# Altium PCB SW6208 Demo board.PcbDoc (part 1 of 2)
Units mm, origin at the board's own origin, x right, y up, seen from the top; angles counter-clockwise.
Board outline 56.6 x 30 mm, 4 copper layers (Top Layer, Mid-Layer 1, Mid-Layer 2, Bottom Layer); 47 components, 75 nets, 261 pads, 411 vias.
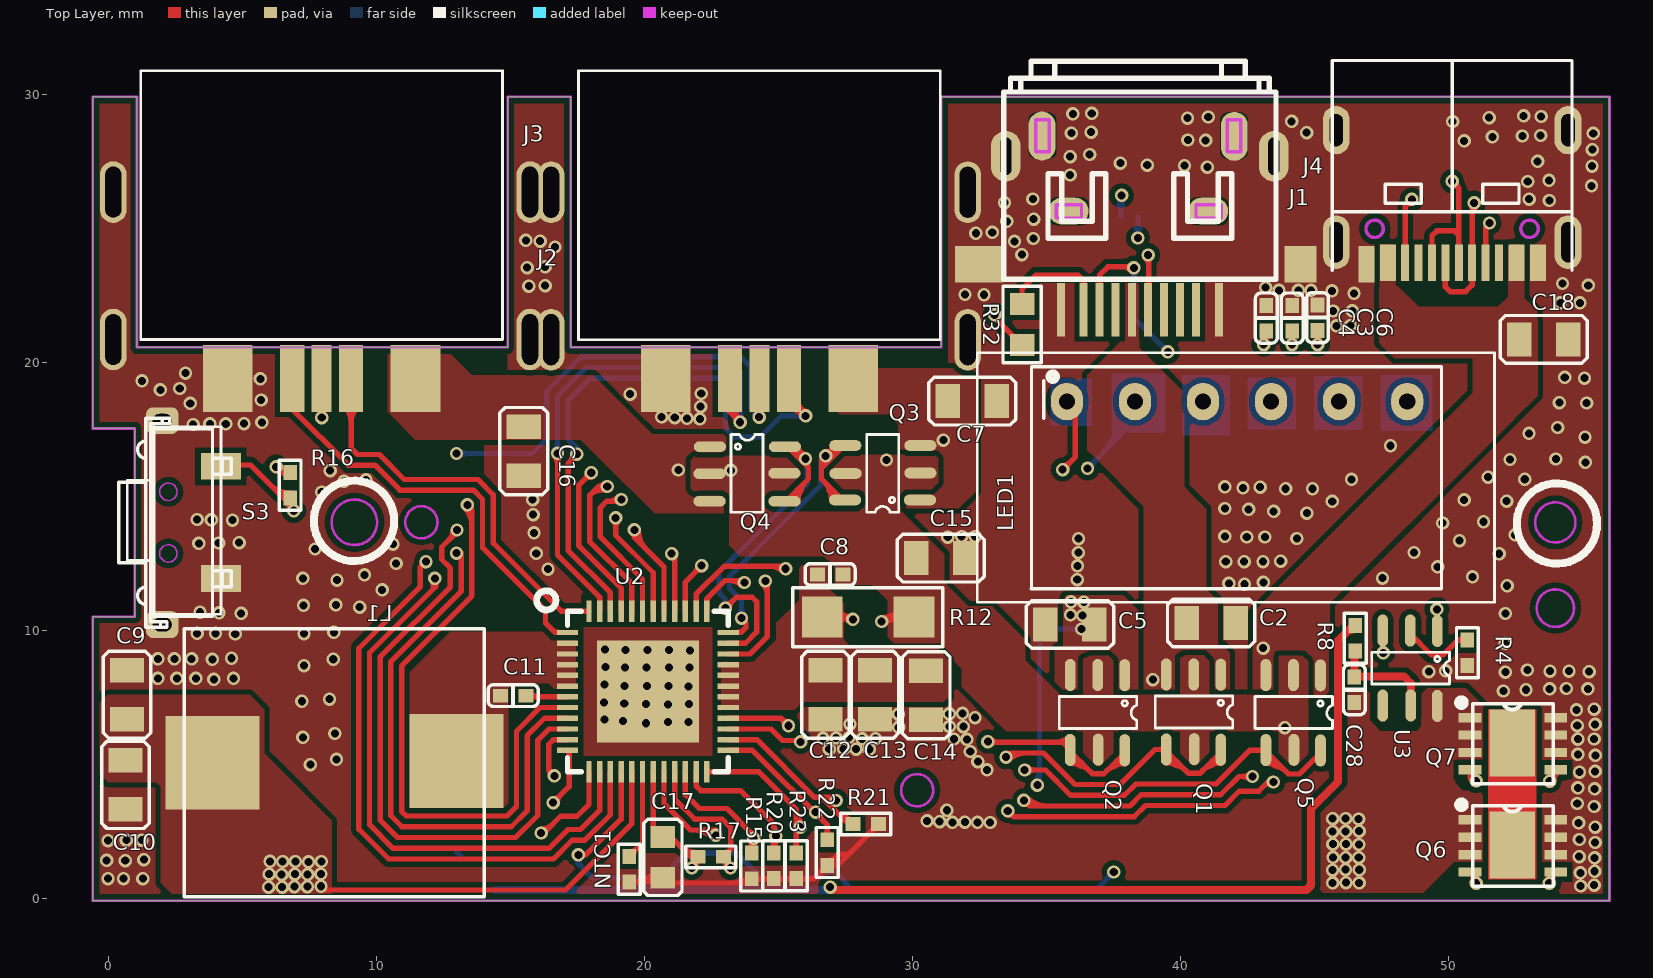
[diagram p0: Top Layer view]
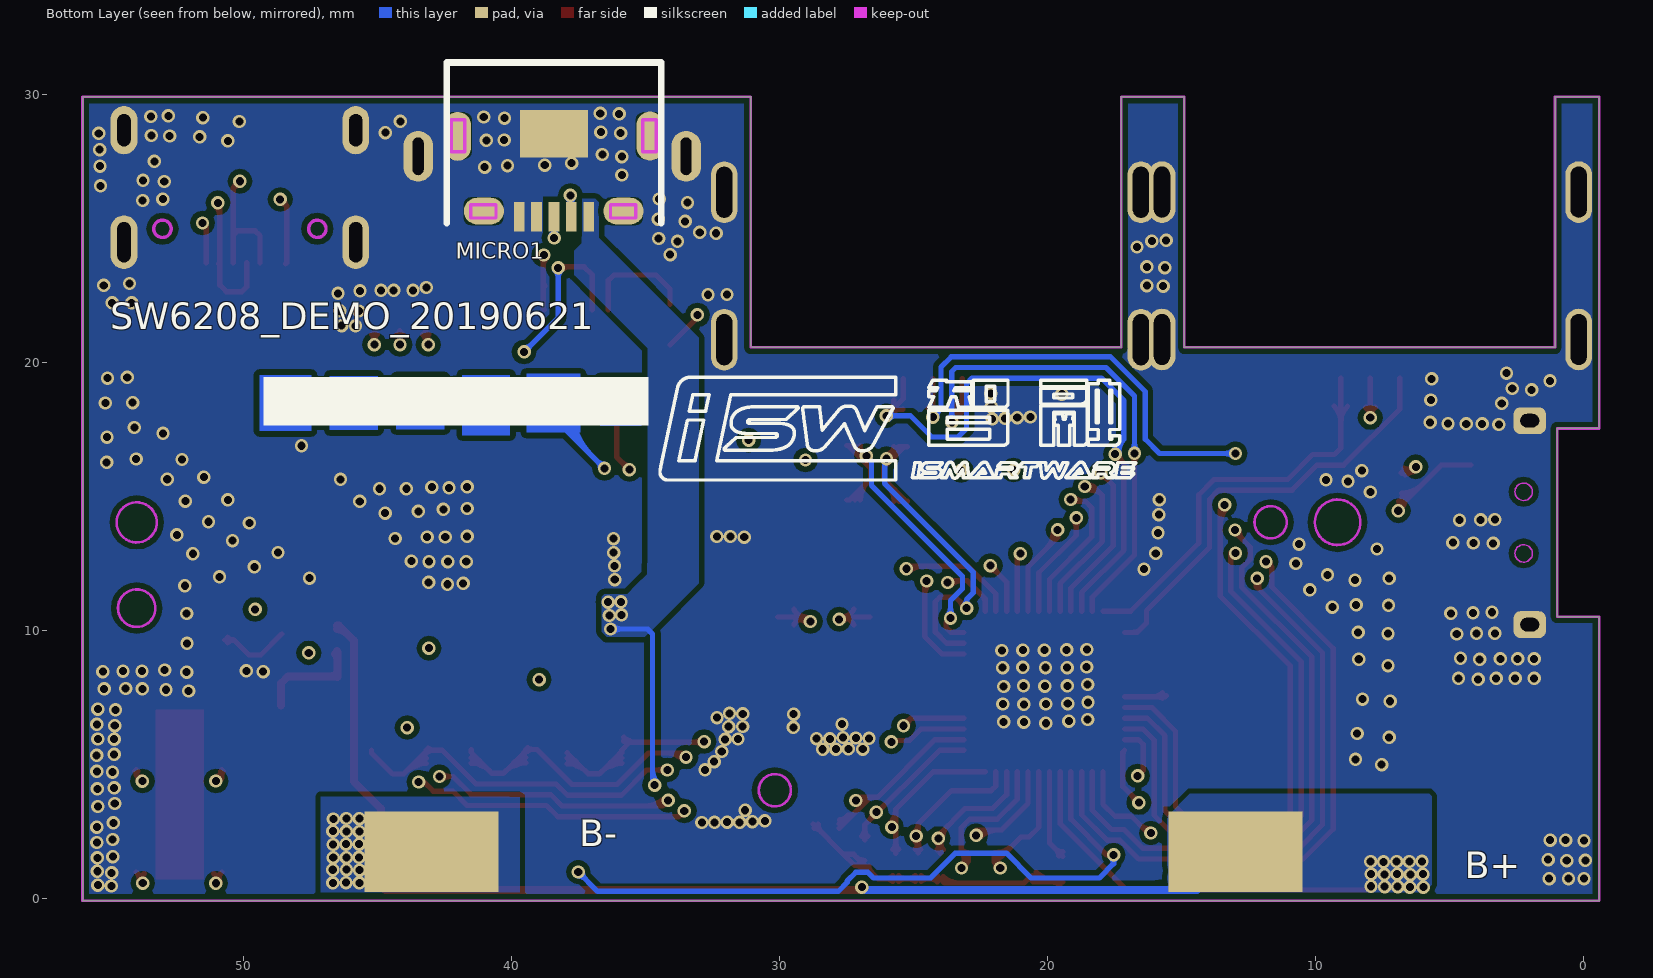
[diagram p1: Bottom Layer view, seen from below]
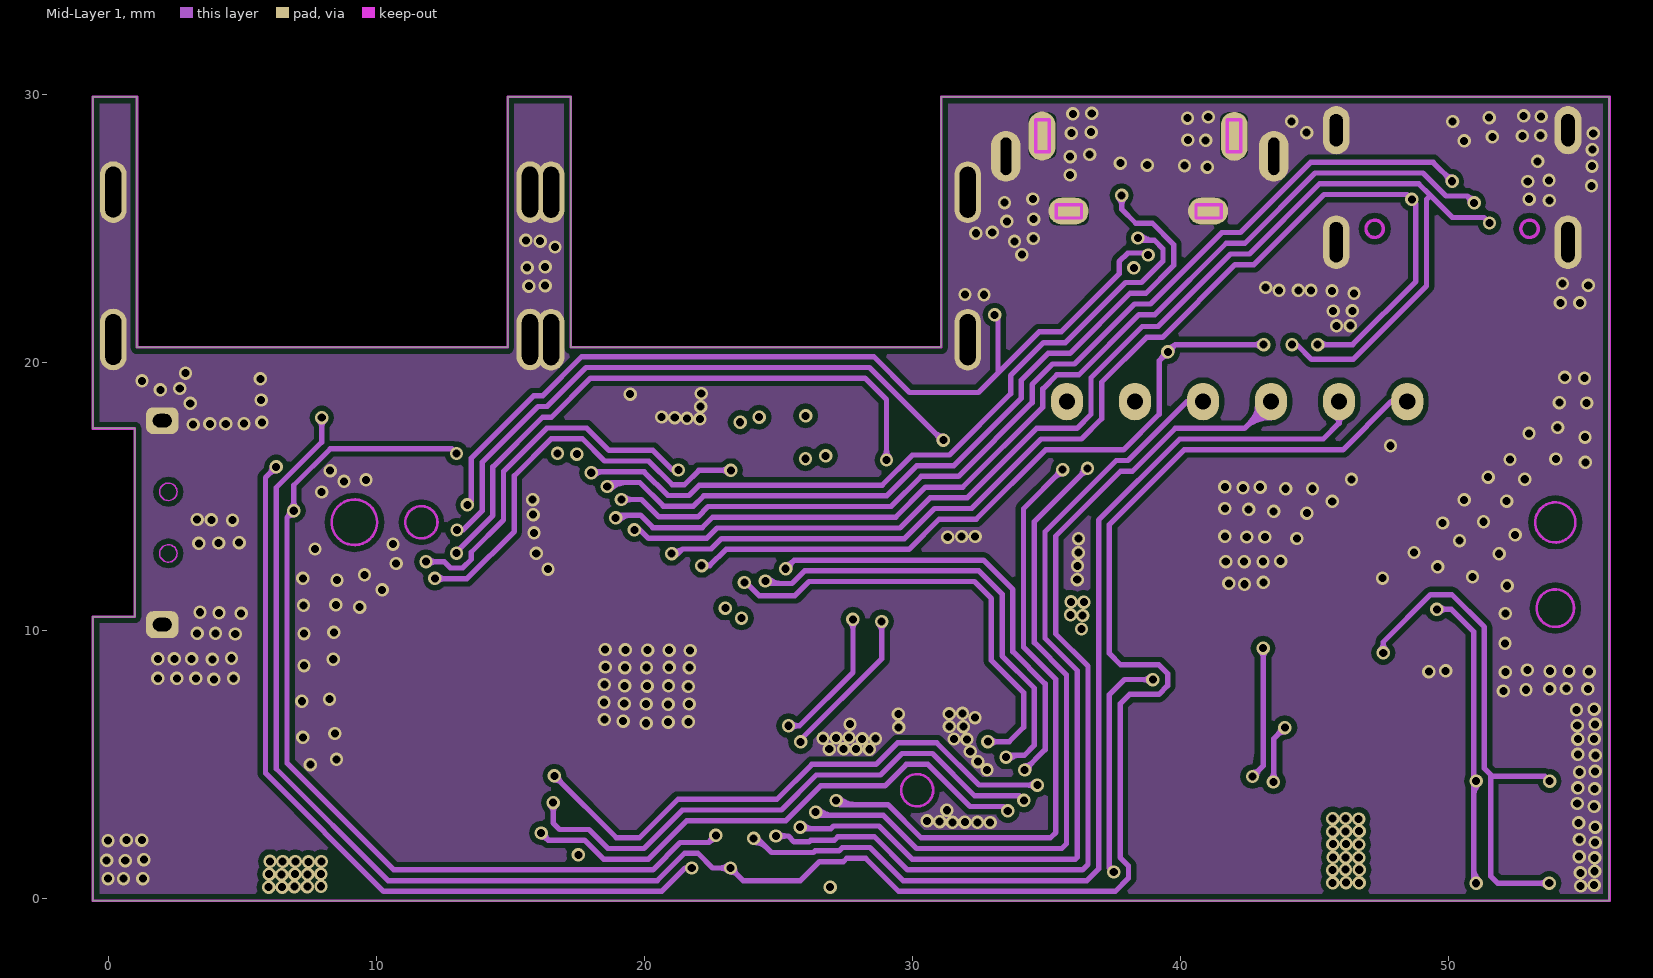
[diagram p2: Mid-Layer 1]
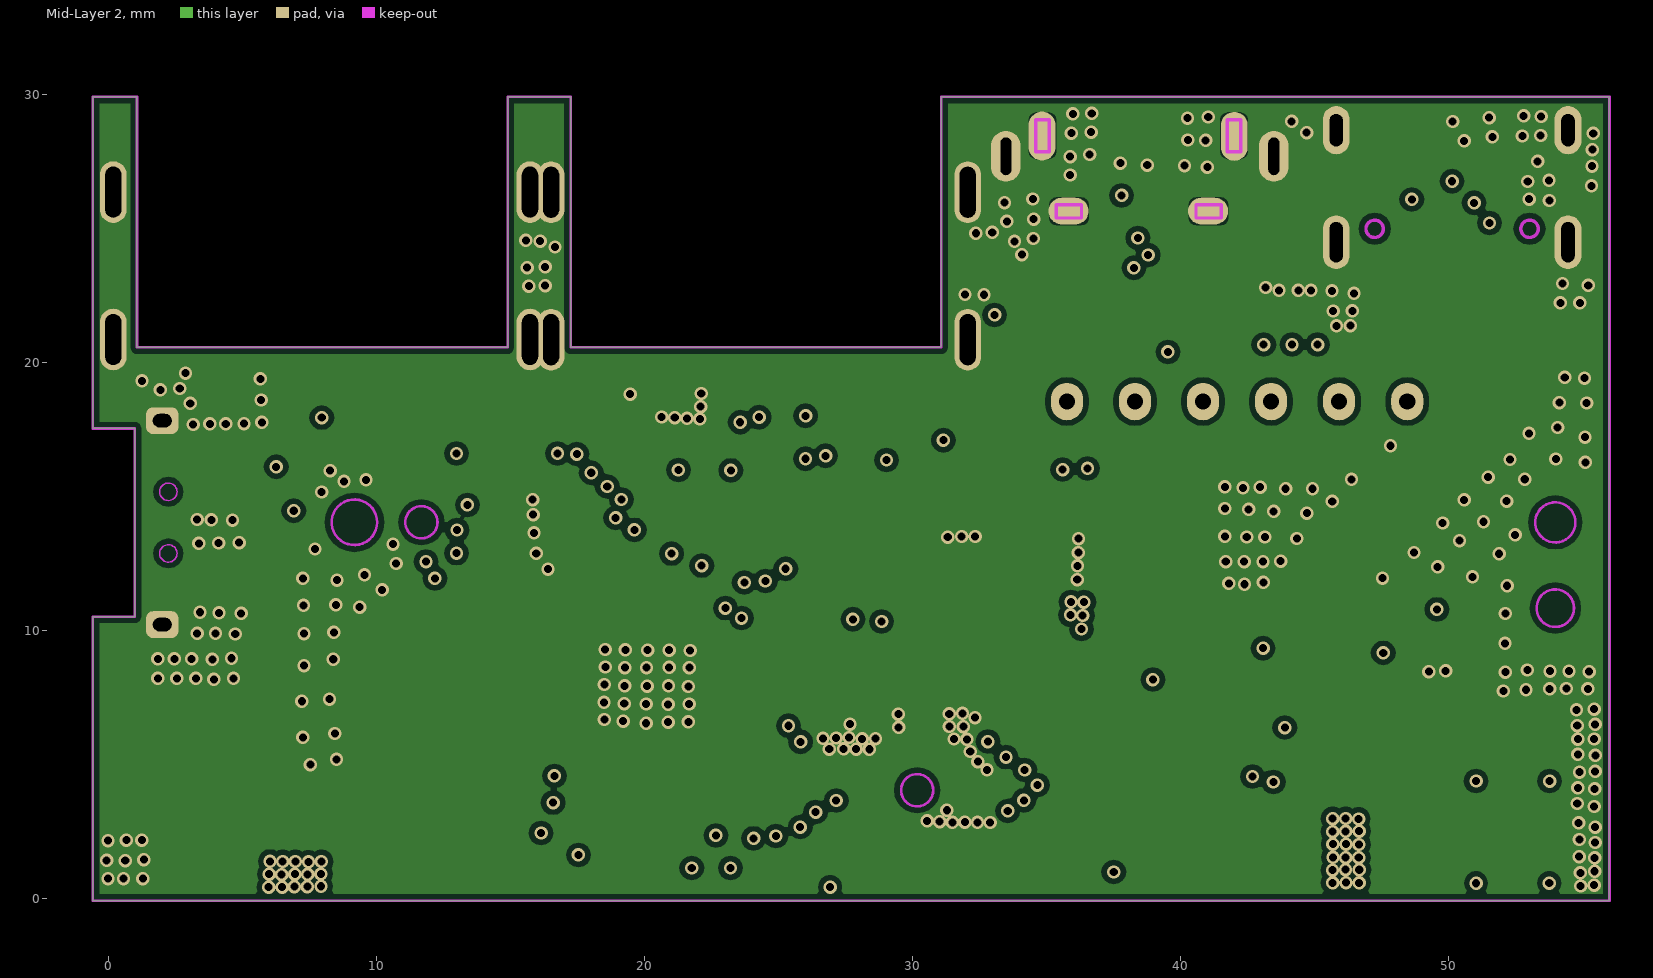
[diagram p3: Mid-Layer 2]

## Layer stack, top to bottom
Top Layer: signal copper 0.0356
Dielectric: core 0.32, FR-4, Dk 4.8
Mid-Layer 1: signal copper 0.0356
Dielectric: prepreg 0.32, FR-4, Dk 4.8
Mid-Layer 2: signal copper 0.0356
Dielectric: core 0.32, FR-4, Dk 4.8
Bottom Layer: signal copper 0.0356

## Board outline
-0.579,-0.07 -0.579,10.533 0.985,10.533 0.985,17.555 -0.579,17.555 -0.579,29.93 1.07,29.93 1.07,20.58 14.904,20.58 14.904,29.93 17.258,29.93 17.258,20.58 31.031,20.58 31.09,20.639 31.085,20.645 31.085,29.93 56.022,29.93 56.022,-0.07

## Design rules (kind name [scope] priority, off if disabled: settings)
Clearance [All] p1: gap=0.2
ComponentClearance [All] p1: gap=0 collisioncheckmode=3 verticalgap=0 showdistances=FALSE
PlaneClearance [All] p1: clearance=0
PlaneConnect [All] p1: planeconnectstyle=Direct reliefexpansion=0.508 reliefentries=4 reliefconductorwidth=0.254 reliefairgap=0.254
PolygonConnect [All] p1: connectstyle=Direct reliefconductorwidth=0.254 reliefentries=4 polygonreliefangle="90 Angle"
RoutingVias [All] p1: holewidth=0.711 width=1.27 viastyle="Through Hole" minholewidth=0.711 minwidth=1.27 maxholewidth=0.711 maxwidth=1.27
SilkscreenOverComponentPads [All] p1: minsilkscreentomaskgap=0.254
SolderMaskExpansion [All] p1: expansion=0.102
Width [All] p1: maxlimit=3 minlimit=0.2 preferedwidth=0.2
24 further rules are at their usual default settings.

## Classes and differential pairs
component class 6206-AABC-app-188数码管: B+ B- C2 C3 C4 C5 C6 C7 C9 C10 C11 C12 C13 C14 C15 C16 C17 C18 C28 J1 J2 J3 J4 LED1 MICRO1 NTC1 Q1 Q2 Q3 Q4 Q5 Q6 Q7 R4 R8 R12 R15 R16 R17 R20 R32 U2 U3

## Components (designator, comment, footprint, x,y, rotation, side; value= is the part's Value field where it differs from the comment)
C2 "C0805" C0805 41.154,10.291 r180 top
C3 "C0402" 0402C 44.183,21.674 r0 top
C4 "C0402" 0402C 43.215,21.674 r0 top
C5 "C0805" C0805 35.889,10.234 r0 top
C6 "C0402" 0402C 45.126,21.686 r0 top
C7 "C0805" C0805 32.239,18.573 r180 top
C8 "C0402" 0402C 26.936,12.105 r90 top (schematic designator C4)
C9 "C0805" C0805 0.7,7.62 r270 top
C10 "C0805" C0805 0.638,4.25 r90 top
C11 "C0603" 0402C 15.109,7.585 r90 top
C12 "C0805" C0805 26.76,7.613 r90 top
C13 "C0805" C0805 28.617,7.613 r90 top
C14 "C0805" C0805 30.524,7.595 r90 top
C15 "C0805" C0805 31.063,12.714 r180 top
C16 "C0805" C0805 15.504,16.71 r90 top
C17 "C0603" c0603 20.698,1.547 r270 top
C18 "C0805" C0805 53.569,20.881 r180 top
C28 "C0402" 0402C 46.502,7.803 r0 top
J1 "APPLE_PORT" Lightning 38.496,21.981 r0 top locked
J2 "Comment" USB-OPPO-1 17.548,20.868 r0 top
J3 "Comment" USB-OPPO-1 1.213,20.874 r0 top
J4 "TYPE-C" TYPEC-1 51.026,27.87 r0 top locked
L1 "Comment" L10*10 8.213,5.38 r0 top locked
LED1 "LED_6" 6-数码管居下 48.464,18.461 r180 top (schematic designator LED?)
MICRO1 "USB_MICRO_B" UMB05H217 38.446,27.006 r180 bottom locked (schematic designator U2)
NTC1 "R0402" R0402 19.433,0.616 r90 top
Q1 "8205" SOT-23-6#1 39.947,7.365 r0 top
Q2 "8205" SOT-23-6#1 36.364,7.346 r0 top
Q3 "8205" SOT-23-6#1 29.296,16.451 r270 top
Q4 "8205" SOT-23-6#1 23.449,15.306 r90 top
Q5 "8205" SOT-23-6#1 43.668,7.341 r0 top
Q6 "PE5A0DZ/NMOS/5mR/DNF3*3" "DFN3*3-EPAD - duplicate" 52.367,1.988 r0 top
Q7 "NC" "DFN3*3-EPAD - duplicate" 52.367,5.799 r0 top
R4 "R0402" R0402 50.715,8.694 r90 top
R8 "R0402" R0402 46.525,9.229 r90 top
R12 "R1206" R1206 26.642,10.516 r0 top
R15 "R0402" R0402 24.004,0.738 r90 top
R16 "R0402" R0402 6.792,15.928 r270 top
R17 "R0402" R0402 21.991,1.573 r0 top
R20 "R0402" R0402 24.834,0.744 r90 top
R21 "R0402" R0402 27.781,2.8 r0 top (schematic designator R20)
R22 "R0402" R0402 26.838,2.218 r270 top (schematic designator R20)
R23 "R0402" R0402 25.681,1.72 r270 top (schematic designator R20)
R32 "R0603" R0603 34.099,21.433 r270 top
S3 "KEY" SW-CC 3.108,14.039 r180 top (schematic designator S1)
U2 "SW6206" QFN48-6206-6*6 20.137,7.739 r0 top
U3 "DW01" SOT-23-6#2 48.781,8.606 r270 top

## Footprints (in the part's own frame and the unit in brackets; to place one, negate y for a bottom-side part, rotate by r counter-clockwise, add the part's x,y. Pads: shape width x height; smd on the part's side, far side on the other; paste and mask are expansions set on the pad)
6-数码管居下 [mm]
  oval 1.2x1.4 hole 0.6: 1(-0.01,-0.097) 2(2.53,-0.097) 3(5.07,-0.097) 4(7.61,-0.097) 5(10.15,-0.097) 5(12.69,-0.097)
  silkscreen extent -1.29,-1.4 14.02,6.89
0402C [mil]
  rect 20x22 smd: 1(0,-18.75) 2(0,18.75)
  silkscreen extent -16,-37 16,37
c0603 [mil]
  rect 32x36 smd: 1(-30,0) 2(30,0)
  silkscreen extent -56,-28 56,28
C0805 [mil]
  rect 36x50 smd: 1(-36,0) 2(36,0)
  silkscreen extent -64,-35 64,35
"DFN3*3-EPAD - duplicate" [mm]
  rect 0.85x0.35 smd: 1(-1.548,0.964) 2(-1.548,0.314) 3(-1.548,-0.336) 4(-1.548,-0.986) 5(1.652,-0.986) 6(1.652,-0.336) 7(1.652,0.314) 8(1.652,0.964)
  rect 1.7x2.5 smd: 9(0.027,0.014)
  silkscreen extent -1.99,-1.51 1.55,1.64
L10*10 [mm]
  rect 3.5x3.5 smd: 1(-4.325,-0.3) 2(4.785,-0.24)
  silkscreen extent -5.37,-5.3 5.83,4.7
Lightning [mm]
  oval 1.1x1.9 hole 0.4 slot 1.4 at 90 deg: 0(-5,5.73) 0(5,5.73)
  rect 1.2x1.35 smd: 0(6,1.7)
  rect 0.3x2 smd: 1(-2.1,0) 2(-1.5,0) 3(-0.9,0) 4(-0.3,0) 5(0.3,0) 6(0.9,0) 7(1.5,0) 8(2.1,0) 9(2.95,0) 10(-2.95,0)
  rect 1.8x1.35 smd: " 0"(-6,1.7)
  silkscreen extent -5.08,1.14 5.08,9.27
QFN48-6206-6*6 [mm]
  rect 0.8x0.2 smd: 1(-3,2.2) 2(-3,1.8) 3(-3,1.4) 4(-3,1) 5(-3,0.6) 6(-3,0.2) 7(-3,-0.2) 8(-3,-0.6) 9(-3,-1) 10(-3,-1.4) 11(-3,-1.8) 12(-3,-2.2) 25(3,-2.2) 26(3,-1.8) 27(3,-1.4) 28(3,-1) 29(3,-0.6) 30(3,-0.2) 31(3,0.2) 32(3,0.6) 33(3,1) 34(3,1.4) 35(3,1.8) 36(3,2.2)
  rect 0.2x0.8 smd: 13(-2.2,-3) 14(-1.8,-3) 15(-1.4,-3) 16(-1,-3) 17(-0.6,-3) 18(-0.2,-3) 19(0.2,-3) 20(0.6,-3) 21(1,-3) 22(1.4,-3) 23(1.8,-3) 24(2.2,-3) 37(2.2,3) 38(1.8,3) 39(1.4,3) 40(1,3) 41(0.6,3) 42(0.2,3) 43(-0.2,3) 44(-0.6,3) 45(-1,3) 46(-1.4,3) 47(-1.8,3) 48(-2.2,3)
  rect 3.8x3.8 smd: 49(0,0)
  silkscreen extent -4.15,-3 3,3.76
R0402 [mil]
  rect 22x20 smd: 1(0.5,-0.25) 2(38,-0.25)
  silkscreen extent -18,-16 56,16
R0603 [mil]
  rect 32x36 smd: 1(-30,0) 2(30,0)
  silkscreen extent -56,-28 56,28
R1206 [mil]
  rect 60x60 smd: 1(0,0) 2(135,0)
  silkscreen extent -43,-44 177,43
SOT-23-6#1 [mm]
  oval 0.4x1.2 smd: 1(1.569,0.999) 1(1.569,0.999) 2(0.56,1.009) 3(-0.468,1.009) 3(-0.468,1.009) 4(-0.468,-1.791) 4(-0.468,-1.791) 5(0.578,-1.781) 5(0.578,-1.781) 6(1.569,-1.801) 6(1.569,-1.801)
  silkscreen extent -0.88,-0.99 2.02,0.21
SOT-23-6#2 [mm]
  oval 1.2x0.4 smd: 1(-1.394,0.816) 2(-1.403,-0.192) 3(-1.403,-1.22) 4(1.397,-1.22) 5(1.386,-0.174) 6(1.406,0.816)
  silkscreen extent -0.6,-1.63 0.59,1.27
SW-CC [mm]
  rect 1.5x1 smd: 1(-1.094,-2.103) 2(-1.094,2.088)
  rrect50% 1.2x1 hole 0.5 slot 0.7 at 0 deg: 2(1.094,3.805) 2(1.094,-3.805)
  Keep-Out Layer circle w0.05: c0.867,1.15 r0.325
  Keep-Out Layer circle w0.05: c0.867,-1.15 r0.325
  silkscreen extent -1.48,-3.9 2.72,3.9
TYPEC-1 [mm]
  rect 0.3x1.35 smd: A5(0.374,-4.13) A6(-0.626,-4.13) A7(-1.126,-4.13) A8(-2.126,-4.13) B5(-2.626,-4.13) B6(-1.626,-4.13) B7(-0.126,-4.13) B8(0.874,-4.13)
  rect 0.6x1.35 smd: B1/A12(-4.076,-4.186) B4/A9(-3.276,-4.13) B9/A4(1.524,-4.13) B12/A1(2.324,-4.13)
  oval 1x2 hole 0.5 slot 1.5 at 90 deg: GND(-5.201,-3.365) GND(3.449,-3.365)
  oval 1x1.8 hole 0.5 slot 1.2 at 90 deg: GND(-5.201,0.815) GND(3.449,0.815)
  Keep-Out Layer circle w0.127: c-3.766,-2.865 r0.325
  Keep-Out Layer circle w0.127: c2.014,-2.865 r0.325
  silkscreen extent -5.35,-4.41 3.6,3.42
UMB05H217 [mm]
  rect 0.4x1.1 smd: 1(1.317,-1.556) 2(0.667,-1.556) 3(0.017,-1.556) 4(-0.633,-1.556) 5(-1.283,-1.556)
  oval 1.5x1 all layers, no hole: 6(2.612,-1.34) 7(-2.598,-1.34)
  oval 1x1.829 all layers, no hole: 6(3.6,1.46) 7(-3.575,1.45)
  rect 1.524x1.778 smd: 8(0.517,1.544) 9(-0.483,1.544)
  Keep-Out Layer lines w0.127: 3.833,0.871 3.833,2.071 3.333,2.071 3.333,0.871 3.833,0.871 ; 3.068,-1.599 3.068,-1.099 2.128,-1.099 2.128,-1.599 3.068,-1.599 ; -2.146,-1.599 -3.086,-1.599 -3.086,-1.099 -2.146,-1.099 -2.146,-1.599 ; -3.314,0.871 -3.314,2.071 -3.814,2.071 -3.814,0.871 -3.314,0.871
  silkscreen extent -3.98,-1.8 4.02,4.2
USB-OPPO-1 [mm]
  oval 1x2.3 hole 0.6 slot 1.9 at 90 deg: 0(-1.025,0) 0(-1.025,5.5) 0(14.525,0) 0(14.525,5.5)
  rect 1.85x2.5 smd: 1(10.25,-1.45) 5(3.25,-1.45)
  rect 0.9x2.5 smd: 2(7.85,-1.45) 4(5.65,-1.45)
  rect 0.75x2.5 smd: 3(6.75,-1.45)
  silkscreen extent 0,0 13.5,10.03

## Part data
S3: library part "SW K"

## Free pads (board coordinates)
  rect 5x3 smd far side: 0(43,1.754) 1(13,1.754)

## Via types
v1: diameter 0.5, hole 0.3, Top Layer to Bottom Layer, tented both sides, 411 vias

## Nets (pads, with @x,y where several pads share a name; then routed paths per layer and width w, separated by ;. In a path a pad name is that pad's centre, name@x,y a point inside that pad or via, vN(x,y) a via of type N, cw(c..) or ccw(c..) an arc to the next point about the centre after c; other vN are vias at no path point)
B+: C9.2 C10.2 L1.1 pad.1 R8.2 U2.17 | length 56.5
  Top Layer w0.2: v1(7.936,0.471) 8.078,0.328 17.059,0.328 19.537,2.806 U2.17@19.537,4.739
  Top Layer w0.3: v1(26.938,0.44) 27.049,0.33 44.71,0.33 44.883,0.502 44.883,0.51 ; 44.772,0.4 44.883,0.51 ; 46.181,9.92 cw(c46.531,9.57) R8.2@46.531,10.065 ; R8.2@46.531,10.194 46.456,10.194 45.898,9.637 45.898,4.38 44.883,3.364 44.883,0.51
  Bottom Layer w0.2: pad.1@13.035,1.789 pad.1@13,1.754 pad.1@13.158,1.596
  Bottom Layer w0.3: pad.1@14.424,0.33 26.828,0.33 v1(26.938,0.44)
  other v1: 5.987,0.439 6.484,0.439 6.942,0.455 7.431,0.455 6.468,0.904 7.439,0.912 6.003,0.92 6.966,0.92 7.936,0.928 6.508,1.393 6.982,1.393 7.471,1.377 7.952,1.393 6.035,1.401
B-: C28.1 pad.0 Q6.1 Q6.2 Q6.3 Q7.1 Q7.2 Q7.3 U3.6
  other v1: 45.693,0.594 46.191,0.606 46.677,0.6 45.686,1.073 46.172,1.092 46.683,1.086 45.705,1.547 46.179,1.541 46.665,1.535 46.671,2.027 45.699,2.039 46.191,2.039 45.693,2.507 46.179,2.519 46.677,2.525 45.693,2.993 46.658,2.98 46.179,2.999
BAT: 
BST: C11.1 U2.7 | length 2.2
  Top Layer w0.2: C11.1@15.585,7.585 15.631,7.539 U2.7@17.137,7.539 ; C11.1@15.719,7.476 cw(c15.871,7.325) 15.871,7.539 ; C11.1@15.719,7.694 ccw(c16.094,8.069) 16.094,7.539
CC1: C3.1 J4.A5 U2.41 | length 57.4
  Top Layer w0.2: v1@19.546,13.647 cw(c19.441,13.49) 19.63,13.49 ; v1@19.58,13.771 ccw(c20.137,13.771) 19.743,13.377 ; v1(19.63,13.771) 19.63,13.49 ; v1@19.713,13.647 ccw(c19.818,13.49) 19.63,13.49 ; v1@19.78,13.771 ccw(c20.82,13.771) 20.084,13.036 ; U2.41@20.737,10.739 20.737,12.383 19.63,13.49 ; v1@44.069,20.79 ccw(c43.795,21.065) C3.1@44.183,21.065 ; C3.1@44.074,21.064 cw(c43.811,20.801) 44.183,20.801 cw(c44.555,20.801) C3.1@44.292,21.064 ; v1@44.114,20.82 ccw(c44.034,20.999) 44.223,20.948 ccw(c44.362,20.911) v1@44.271,20.8 ; v1(44.175,20.684) 44.183,20.691 C3.1@44.183,21.198 ; C3.1@44.183,21.027 ccw(c44.519,21.027) v1@44.282,20.79 ; J4.A5@51.399,23.74 51.399,25.078 v1(51.543,25.222)
  Mid-Layer 1 w0.2: v1(19.63,13.771) 19.842,13.771 20.159,13.454 22.332,13.454 22.719,13.841 29.546,13.841 30.67,14.966 32.053,14.966 34.646,17.558 36.147,17.558 36.674,18.085 36.674,19.446 38.585,21.356 39.177,21.356 41.886,24.066 42.584,24.066 45.203,26.685 48.899,26.685 49.338,26.246 ; v1(44.175,20.684) 44.351,20.684 44.901,20.134 46.455,20.134 49.194,22.873 49.194,26.102 49.338,26.246 ; v1(51.543,25.222) 51.339,25.426 50.158,25.426 49.338,26.246
CC2: C6.1 J4.B5 U2.40 | length 50.3
  Top Layer w0.2: v1(21.025,12.88) 21.137,12.768 U2.40@21.137,10.739 ; C6.1@45.018,21.076 cw(c44.755,20.813) 45.126,20.813 cw(c45.498,20.813) C6.1@45.235,21.076 ; v1@45.022,20.79 ccw(c44.771,21.041) C6.1@45.126,21.041 ; v1@45.041,20.805 ccw(c44.964,20.912) 45.091,20.946 ccw(c45.285,20.998) v1@45.195,20.818 ; v1@45.061,20.818 ccw(c44.975,20.989) 45.16,20.94 ccw(c45.275,20.909) v1@45.21,20.809 ; C6.1@45.126,21.051 ccw(c45.495,21.051) v1@45.234,20.79 ; C6.1@45.126,21.21 45.126,20.686 v1(45.128,20.684) ; J4.B5@48.449,23.69 J4.B5@48.399,23.74 48.399,25.856 ; v1@48.494,26.097 cw(c48.169,26.087) 48.399,25.856 ; v1@48.64,25.952 ccw(c48.629,25.626) 48.399,25.856 ; v1(48.644,26.102) 48.399,25.856
  Mid-Layer 1 w0.2: v1(21.025,12.88) 21.253,12.88 21.426,13.054 ; v1@21.099,13.01 ccw(c21.234,13.246) 21.426,13.054 ; v1(45.128,20.684) 46.439,20.684 48.794,23.039 48.794,25.952 v1(48.644,26.102) 48.461,26.285 45.369,26.285 42.75,23.666 42.052,23.666 39.342,20.956 38.75,20.956 37.074,19.28 37.074,17.919 36.313,17.158 34.811,17.158 32.219,14.566 30.836,14.566 29.711,13.441 22.885,13.441 22.497,13.054 21.426,13.054 ; v1@45.234,20.578 cw(c45.491,20.322) 45.491,20.684 cw(c45.491,21.046) v1@45.234,20.79
CCL/WLED: C4.1 J1.2 U2.39 | length 40.4
  Top Layer w0.2: U2.39@21.537,10.739 21.537,11.824 v1(22.146,12.433) ; v1@21.996,12.433 cw(c21.634,12.433) 21.89,12.177 cw(c22.146,11.921) v1@22.146,12.283 ; J1.2@36.996,21.981 36.996,23.279 37.302,23.585 38.24,23.585 v1(38.274,23.55) ; v1@43.025,20.801 ccw(c42.707,21.198) C4.1@43.215,21.198 43.215,20.781 v1(43.118,20.684) ; C4.1@43.107,21.064 cw(c42.844,20.801) 43.215,20.801 cw(c43.587,20.801) C4.1@43.324,21.064 ; 37.829,23.585 cw(c37.829,23.105) 38.168,23.444 ccw(c37.829,23.105) 37.829,23.585 ; 37.995,23.585 ccw(c37.995,23.829) 38.168,23.657 cw(c37.995,23.829) 37.995,23.585
  Mid-Layer 1 w0.2: v1(22.146,12.433) 22.442,12.433 ; v1@22.267,12.344 cw(c22.442,12.215) 22.442,12.433 ; v1@22.267,12.522 ccw(c22.442,12.651) 22.442,12.433 ; v1@39.394,20.412 cw(c39.032,20.412) 39.288,20.155 cw(c39.544,19.899) v1@39.544,20.262 ; v1@39.544,20.562 ccw(c39.544,20.924) 39.8,20.668 ccw(c40.056,20.412) v1@39.694,20.412 ; v1@43.012,20.578 ccw(c42.756,20.322) 42.756,20.684 ccw(c42.756,21.046) v1@43.012,20.79 ; v1(43.118,20.684) 39.816,20.684 v1(39.544,20.412) 39.214,20.081 39.214,18.085 37.887,16.758 34.977,16.758 32.385,14.166 31.002,14.166 29.877,13.041 23.05,13.041 22.442,12.433
  Bottom Layer w0.2: v1@38.168,23.444 cw(c37.912,23.188) 38.274,23.188 cw(c38.636,23.188) v1@38.38,23.444 ; v1(38.274,23.55) 38.274,21.682 v1(39.544,20.412) ; v1@39.394,20.412 ccw(c39.032,20.412) 39.288,20.668 ccw(c39.544,20.924) v1@39.544,20.562
DATA: J1.5 R32.2 U2.8 | length 62
  Top Layer w0.2: v1@13.295,14.595 cw(c12.638,13.938) 13.567,13.938 ; v1@13.388,14.552 cw(c13.371,14.357) 13.567,14.357 ; v1(13.401,14.701) 13.401,14.565 13.567,14.399 13.567,11.307 10.948,8.687 10.948,3.266 11.123,3.09 14.872,3.09 15.231,3.45 15.231,6.255 16.116,7.139 U2.8@17.137,7.139 ; v1@13.436,14.736 cw(c13.12,14.421) 13.567,14.421 ; v1@13.533,14.63 ccw(c13.706,14.538) 13.567,14.399 ; v1(33.075,21.793) 33.075,21.695 R32.2@34.099,20.671 ; v1@38.702,23.922 cw(c38.406,23.626) 38.824,23.626 ; J1.5@38.76,22.867 ccw(c38.607,23.02) 38.824,23.02 ; J1.5@38.796,21.981 38.824,22.01 38.824,24.011 v1(38.808,24.028) ; 38.824,23.706 cw(c39.13,23.706) v1@38.914,23.922
  Mid-Layer 1 w0.2: v1(13.401,14.701) 13.551,14.851 13.551,16.453 15.871,18.773 16.21,18.773 17.666,20.23 28.569,20.23 29.903,18.895 32.476,18.895 33.205,19.624 ; v1(33.075,21.793) 33.205,21.663 33.205,19.624 ; v1(38.808,24.028) 38.735,24.1 38.046,24.1 37.724,23.778 37.724,23.324 35.558,21.158 34.739,21.158 33.205,19.624
DMA1: J2.2 U2.46 | length 26.9
  Top Layer w0.2: 17.206,16.289 ccw(c16.896,16.598) v1@17.334,16.598 ; 17.281,16.364 cw(c17.484,16.162) v1@17.484,16.448 ; v1(17.484,16.598) 17.484,16.567 17.162,16.246 17.162,13.004 18.737,11.429 U2.46@18.737,10.739 ; J2.2@25.398,19.418 25.398,18.655 v1(26.025,18.027) ccw(c25.443,17.445) J2.2@25.411,18.268 ; J2.2@25.748,18.618 ccw(c26.503,18.618) v1@25.969,18.084 ; J2.2@25.802,18.374 ccw(c26.176,18.59) v1@26.064,18.172 ; 25.851,18.287 cw(c25.599,18.142) v1@25.88,18.066 ; v1@25.875,18.027 ccw(c25.513,18.027) 25.769,18.283 ccw(c26.025,18.539) v1@26.025,18.177 ; v1@25.88,17.988 ccw(c25.531,17.895) 25.712,18.208 ccw(c25.893,18.522) v1@25.987,18.172
  Bottom Layer w0.2: v1@17.336,16.622 ccw(c16.725,16.718) 17.162,17.155 ; 17.44,16.877 cw(c17.205,16.642) v1@17.533,16.591 ; v1(17.484,16.598) 17.484,16.833 17.162,17.155 ; v1@25.919,17.921 ccw(c25.663,17.665) 25.663,18.027 ccw(c25.663,18.389) v1@25.919,18.133 ; v1(26.025,18.027) 25.121,18.027 24.329,17.235 23.355,17.235 23.033,17.557 23.033,19.22 22.824,19.43 17.998,19.43 17.162,18.594 17.162,17.155
DMA2: J3.2 U2.48 | length 16.4
  Top Layer w0.2: J3.2@8.816,18.377 cw(c8.218,17.779) 9.063,17.779 cw(c9.908,17.779) J3.2@9.311,18.377 ; J3.2@9.063,19.424 9.063,16.828 9.307,16.583 10.114,16.583 11.046,15.651 13.794,15.651 14.367,15.078 14.367,13.274 16.903,10.739 U2.48@17.937,10.739
DMB: MICRO1.2 U2.44 | length 40.6
  Top Layer w0.2: 18.217,15.317 cw(c18.531,15.003) v1@18.631,15.436 ; v1@18.507,15.288 ccw(c18.287,15.093) 18.287,15.387 ; v1@18.507,15.486 cw(c18.287,15.681) 18.287,15.387 ; v1@18.586,15.241 ccw(c18.435,14.589) 17.962,15.062 ; v1(18.62,15.387) 18.287,15.387 ; U2.44@19.537,10.739 19.537,11.76 17.962,13.335 17.962,15.062 ; 17.962,15.062 18.287,15.387
  Mid-Layer 1 w0.2: v1@18.584,15.422 cw(c18.861,15.146) 18.861,15.537 ; v1(18.62,15.387) 18.639,15.387 18.789,15.537 19.833,15.537 20.716,14.654 21.835,14.654 22.222,15.041 29.049,15.041 30.173,16.166 31.556,16.166 34.074,18.683 34.074,19.362 35.07,20.358 35.889,20.358 38.132,22.6 38.724,22.6 39.758,23.634 39.758,24.421 38.966,25.213 38.343,25.213 37.815,25.741 v1(37.815,26.25) ; v1@18.726,15.281 cw(c19.344,14.663) 19.344,15.537 ; v1@37.709,26.144 cw(c37.453,25.887) 37.815,25.887 cw(c38.177,25.887) v1@37.921,26.144
  Bottom Layer w0.2: v1@37.706,26.147 cw(c37.556,26.006) 37.755,25.952 cw(c38.011,25.883) v1@37.886,26.117 ; MICRO1.2@37.708,25.871 ccw(c37.538,26.042) 37.779,26.042 ccw(c38.02,26.042) MICRO1.2@37.85,25.871 ; v1@37.709,26.144 cw(c37.541,25.975) MICRO1.2@37.779,25.975 ; MICRO1.2@37.779,25.45 37.779,26.213 v1(37.815,26.25) ; MICRO1.2@37.779,25.8 cw(c38.265,25.8) v1@37.921,26.144
DMC: J4.A7 J4.B7 U2.42 | length 50.1
  Top Layer w0.2: v1@18.83,14.113 cw(c18.574,13.857) 18.936,13.857 cw(c19.298,13.857) v1@19.042,14.113 ; v1(18.936,14.219) 18.936,13.569 20.337,12.168 U2.42@20.337,10.739 ; J4.A7@49.899,23.74 49.899,22.831 50.072,22.658 50.654,22.658 50.899,22.903 J4.B7@50.899,23.74 ; 50.899,25.443 cw(c51.503,25.443) v1@51.076,25.87 ; J4.B7@50.935,23.704 J4.B7@50.899,23.74 ; v1(50.97,25.976) 50.899,25.905 J4.B7@50.899,23.74
  Mid-Layer 1 w0.2: v1(18.936,14.219) 19.038,14.321 19.857,14.321 20.325,13.854 22.166,13.854 22.553,14.241 29.38,14.241 30.505,15.366 31.888,15.366 34.874,18.352 34.874,19.031 35.401,19.558 36.221,19.558 38.463,21.8 39.055,21.8 41.721,24.466 42.418,24.466 45.037,27.085 49.064,27.085 49.92,26.229 50.717,26.229 ; v1@19.042,14.113 cw(c19.545,13.61) 19.545,14.321 ; v1@50.82,25.977 ccw(c50.468,25.98) 50.717,26.229 ; v1@50.969,26.126 cw(c50.966,26.478) 50.717,26.229 ; v1(50.97,25.976) 50.717,26.229
DPA1: J2.4 U2.47 | length 24.8
  Top Layer w0.2: v1@16.656,16.517 cw(c16.4,16.261) 16.762,16.261 cw(c17.124,16.261) v1@16.868,16.517 ; v1(16.762,16.623) 16.762,12.838 18.337,11.263 U2.47@18.337,10.739 ; J2.4@23.155,18.643 ccw(c23.504,18.437) 23.217,18.151 ; J2.4@23.198,19.418 23.198,18.17 v1(23.583,17.785) ; J2.4@23.263,18.205 ccw(c23.774,18.5) v1@23.622,17.93 ; J2.4@23.327,18.541 ccw(c23.734,18.302) 23.4,17.968 ; 23.381,18.001 ccw(c23.511,18.076) v1@23.547,17.931 ; v1@23.433,17.785 ccw(c23.071,17.785) 23.327,18.041 ccw(c23.583,18.297) v1@23.583,17.935 ; v1@23.449,17.852 ccw(c23.283,17.935) 23.443,18.027 ccw(c23.603,18.119) v1@23.592,17.935 ; J2.4@23.499,18.44 ccw(c23.964,18.166) v1(23.583,17.785)
  Bottom Layer w0.2: v1@16.656,16.729 ccw(c16.4,16.985) 16.762,16.985 ccw(c17.124,16.985) v1@16.868,16.729 ; v1(16.762,16.623) 16.762,18.76 17.832,19.83 23.434,19.83 23.583,19.681 v1(23.583,17.785) ; v1@23.477,17.891 ccw(c23.221,18.147) 23.583,18.147 ccw(c23.945,18.147) v1@23.689,17.891
DPA2: J3.4 U2.1 | length 16.5
  Top Layer w0.2: J3.4@6.863,19.424 6.863,18.28 8.96,16.183 9.948,16.183 10.88,15.251 13.629,15.251 13.967,14.913 13.967,13.109 16.317,10.759 16.317,10.29 16.669,9.939 U2.1@17.137,9.939 ; 16.55,10.058 ccw(c16.837,10.345) U2.1@16.837,9.939
DPB: MICRO1.3 U2.45 | length 36.7
  Top Layer w0.2: v1@17.874,15.902 cw(c17.512,15.902) 17.768,15.646 cw(c18.024,15.39) v1@18.024,15.752 ; v1(18.024,15.902) 17.562,15.44 17.562,13.17 19.137,11.595 U2.45@19.137,10.739
  Mid-Layer 1 w0.2: v1(18.024,15.902) 18.059,15.937 19.999,15.937 20.882,15.054 21.669,15.054 22.056,15.441 28.883,15.441 30.007,16.566 31.391,16.566 33.674,18.849 33.674,19.528 34.904,20.758 35.724,20.758 37.966,23 38.558,23 39.358,23.8 39.358,24.256 39.035,24.578 38.506,24.578 v1(38.421,24.663) ; v1@18.13,15.796 cw(c18.471,15.454) 18.471,15.937 ; v1@18.13,16.008 ccw(c18.301,16.178) 18.301,15.937 ; v1@38.527,24.769 ccw(c38.988,25.23) 38.988,24.578
  Bottom Layer w0.2: v1@38.315,24.769 ccw(c38.039,25.045) MICRO1.3@38.429,25.045 ; MICRO1.3@38.358,25.029 cw(c38.188,24.859) 38.429,24.859 cw(c38.67,24.859) MICRO1.3@38.5,25.029 ; v1(38.421,24.663) 38.429,24.671 MICRO1.3@38.429,25.45 ; MICRO1.3@38.429,25.005 ccw(c38.763,25.005) v1@38.527,24.769
DPC: J4.A6 J4.B6 U2.43 | length 50.5
  Top Layer w0.2: 18.623,14.837 ccw(c18.623,15.427) v1@19.041,15.01 ; v1(19.147,14.904) 19.08,14.837 18.594,14.837 18.362,14.605 18.362,13.501 19.937,11.926 U2.43@19.937,10.739 ; J4.B6@49.399,23.74 49.399,24.748 49.581,24.929 50.23,24.929 ; v1(50.148,26.779) 50.399,26.528 ; v1@50.15,26.629 cw(c50.155,26.284) 50.399,26.528 ; v1@50.298,26.777 ccw(c50.643,26.772) 50.399,26.528 ; 50.396,24.929 50.23,24.929 ; J4.A6@50.399,23.74 50.399,24.759 ; 50.23,24.929 50.399,24.759 ; 50.399,24.759 50.399,26.528
  Mid-Layer 1 w0.2: v1(19.147,14.904) 19.9,14.904 20.551,14.254 22,14.254 22.387,14.641 29.214,14.641 30.339,15.766 31.722,15.766 34.474,18.518 34.474,19.196 35.236,19.958 36.055,19.958 38.298,22.2 38.889,22.2 41.555,24.866 42.253,24.866 44.872,27.485 49.442,27.485 v1(50.148,26.779) ; v1@19.253,14.798 cw(c19.509,14.542) 19.509,14.904 cw(c19.509,15.266) v1@19.253,15.01 ; v1@49.998,26.779 ccw(c49.636,26.779) 49.892,27.035 ccw(c50.148,27.291) v1@50.148,26.929
FLED/BSET/IDA2: J3.3 LED1.1 R17.2 U2.21 | length 92
  Top Layer w0.2: J3.3@7.786,18.339 cw(c7.465,17.958) v1@7.963,17.958 ; v1@7.857,18.059 ccw(c7.743,18.169) 7.896,18.21 ccw(c8.045,18.25) v1@8.005,18.1 ; v1@7.859,18.062 ccw(c7.609,18.312) J3.3@7.963,18.312 ; v1@7.927,18.1 ccw(c7.89,18.24) 8.029,18.202 ccw(c8.163,18.166) v1@8.068,18.065 ; J3.3@7.963,18.323 ccw(c8.333,18.323) v1@8.071,18.062 ; J3.3@7.963,19.424 v1@7.963,17.958 ; v1(7.965,17.956) v1@7.963,17.958 ; J3.3@8.14,18.339 ccw(c8.461,17.958) v1@7.963,17.958 ; U2.21@21.137,4.739 21.137,3.723 21.89,2.97 22.917,2.97 23.226,2.661 23.226,1.836 ; R17.2@22.982,1.721 ccw(c22.982,2.031) R17.2@23.201,1.812 ; v1@23.069,1.153 ccw(c22.707,1.153) 22.963,1.409 ccw(c23.219,1.665) v1@23.219,1.303 ; v1@23.072,1.182 ccw(c22.656,1.266) R17.2@22.956,1.567 ; v1@23.102,1.246 ccw(c22.993,1.333) 23.092,1.431 R17.2@22.956,1.567 ; R17.2@23.129,1.521 ccw(c23.478,1.412) v1(23.219,1.153) 22.956,1.416 R17.2@22.956,1.567 ; R17.2@23.129,1.567 R17.2@22.956,1.567 ; R17.2@23.135,1.582 cw(c23.449,1.613) 23.226,1.836 ; R17.2@22.956,1.567 23.226,1.836
  Mid-Layer 1 w0.2: v1@7.859,17.849 cw(c7.603,17.593) 7.965,17.593 cw(c8.328,17.593) v1@8.071,17.849 ; v1(7.965,17.956) 7.965,17.044 6.269,15.348 6.269,4.855 10.444,0.68 20.486,0.68 21.509,1.703 22.002,1.703 22.552,1.153 v1(23.219,1.153) 23.693,0.68 25.834,0.68 26.545,1.39 27.433,1.39 27.559,1.516 28.262,1.516 29.498,0.28 37.578,0.28 38.072,0.774 38.072,1.23 37.759,1.543 37.759,7.278 38.114,7.633 39.21,7.633 39.533,7.955 39.533,8.411 39.21,8.733 37.784,8.733 37.359,9.158 37.359,13.967 40.15,16.758 46.073,16.758 47.873,18.558 ; v1@23.113,1.047 ccw(c22.857,0.791) 22.857,1.153 ccw(c22.857,1.515) v1@23.113,1.259 ; v1@23.219,1.003 cw(c23.219,0.641) 23.475,0.897 cw(c23.731,1.153) v1@23.369,1.153 ; LED1.1@47.982,18.467 ccw(c47.873,18.446) 47.873,18.558 ; LED1.1@47.982,18.649 cw(c47.873,18.67) 47.873,18.558 ; LED1.1@48.474,18.558 47.873,18.558
GATEA1: Q3.4 Q3.6 U2.36 | length 23
  Top Layer w0.2: U2.36@23.137,9.939 23.616,9.939 23.796,10.119 23.796,10.312 v1(23.631,10.477) ; U2.36@23.437,9.939 ccw(c23.437,10.371) 23.743,10.066 ; 26.616,16.055 cw(c26.996,16.055) v1@26.833,16.399 ; v1@26.646,16.447 cw(c26.414,16.282) 26.616,16.08 ; v1@26.763,16.485 ccw(c26.816,16.968) 27.16,16.624 ; v1(26.768,16.534) 26.616,16.382 26.616,16.08 ; 26.783,16.247 ccw(c26.609,16.421) v1@26.809,16.563 ; v1@26.785,16.683 ccw(c26.874,17.499) Q3.4@27.454,16.919 ; v1@26.798,16.681 ccw(c26.849,16.935) Q3.4@27.073,16.806 ; 26.879,15.316 ccw(c27.431,15.464) Q3.6@27.145,14.969 ; v1@26.889,16.486 cw(c27.44,16.338) Q3.4@27.155,16.832 ; Q3.6@27.495,14.883 27.399,14.883 26.616,15.666 26.616,16.08 ; Q3.4@27.505,16.919 Q3.4@27.454,16.919 ; 26.616,16.08 Q3.4@27.454,16.919 ; v1@26.681,16.412 cw(c26.592,16.287) 26.721,16.203 ccw(c26.592,16.287) v1@26.681,16.412 ; 26.687,16.151 ccw(c25.919,16.919) 27.005,16.919 cw(c25.919,16.919) 26.687,16.151 ; 26.71,15.571 cw(c26.022,14.883) 26.995,14.883 ccw(c26.022,14.883) 26.71,15.571 ; v1@26.797,16.493 ccw(c26.556,16.846) 26.976,16.767 cw(c26.556,16.846) v1@26.797,16.493 ; 27.028,16.493 ccw(c26.602,16.919) 27.205,16.919 cw(c26.602,16.919) 27.028,16.493 ; 27.052,15.23 cw(c26.705,14.883) 27.195,14.883 ccw(c26.705,14.883) 27.052,15.23 ; Q3.4@27.37,16.834 ccw(c27.285,16.919) 27.405,16.919 cw(c27.285,16.919) Q3.4@27.37,16.834 ; Q3.6@27.393,14.888 cw(c27.387,14.883) 27.395,14.883 ccw(c27.387,14.883) Q3.6@27.393,14.888
  Bottom Layer w0.2: v1@23.525,10.583 ccw(c23.269,10.839) 23.631,10.839 ccw(c23.993,10.839) v1@23.737,10.583 ; v1(23.631,10.477) 23.631,11.13 23.184,11.577 23.184,12.032 26.58,15.428 26.58,16.346 v1(26.768,16.534)
GATEA2: Q4.4 Q4.6 U2.35 | length 25.9
  Top Layer w0.2: v1(23.03,10.848) 23.437,11.254 24.031,11.254 24.196,11.089 24.196,9.953 23.782,9.539 U2.35@23.137,9.539 ; v1@23.03,10.998 ccw(c23.03,11.36) 23.286,11.104 ccw(c23.542,10.848) v1@23.18,10.848 ; Q4.4@25.24,14.838 25.291,14.838 26.129,15.677 26.129,16.091 ; Q4.6@25.25,16.875 Q4.6@25.346,16.875 ; Q4.6@25.385,16.836 ccw(c26.017,17.467) 26.017,16.574 cw(c26.017,16.936) 25.761,16.68 cw(c25.505,16.424) v1@25.867,16.424 ; Q4.4@25.59,14.925 ccw(c25.305,15.42) 25.856,15.272 ; Q4.6@25.6,16.788 cw(c25.314,16.293) v1@25.866,16.441 ; Q4.6@25.683,16.758 ccw(c26.002,16.943) v1@26.013,16.574 ; 25.727,16.494 ccw(c26.017,16.784) v1@26.017,16.374 ; v1(26.017,16.424) 25.566,16.875 Q4.6@25.346,16.875 ; v1@26.126,16.321 ccw(c26.246,16.208) 26.129,16.091 ; Q4.6@25.346,16.875 26.129,16.091 ; Q4.6@25.75,16.875 ccw(c26.192,16.875) 25.879,16.562 cw(c26.192,16.875) Q4.6@25.75,16.875 ; Q4.6@25.75,16.875 ccw(c26.723,16.875) 26.035,16.186 cw(c26.723,16.875) Q4.6@25.75,16.875 ; Q4.4@25.34,14.838 cw(c25.46,14.838) 25.375,14.923 ccw(c25.46,14.838) Q4.4@25.34,14.838 ; Q4.6@25.35,16.875 ccw(c25.358,16.875) 25.352,16.869 cw(c25.358,16.875) Q4.6@25.35,16.875 ; Q4.4@25.54,14.838 cw(c26.143,14.838) 25.717,15.265 ccw(c26.143,14.838) Q4.4@25.54,14.838 ; Q4.6@25.55,16.875 ccw(c26.04,16.875) 25.693,16.528 cw(c26.04,16.875) Q4.6@25.55,16.875 ; Q4.4@25.74,14.838 cw(c26.826,14.838) 26.058,15.606 ccw(c26.826,14.838) Q4.4@25.74,14.838 ; Q4.6@25.75,16.785 ccw(c26.137,17.009) 26.047,16.571 cw(c26.137,17.009) Q4.6@25.75,16.785 ; 25.753,16.674 ccw(c25.941,16.783) 25.986,16.571 cw(c25.941,16.783) 25.753,16.674
  Bottom Layer w0.2: v1@22.935,10.964 ccw(c22.769,11.165) 23.03,11.165 ; v1(23.03,10.848) 23.03,11.165 ; v1@23.125,10.964 cw(c23.291,11.165) 23.03,11.165 ; v1(26.017,16.424) 26.089,16.352 26.089,15.503 22.784,12.198 22.784,11.411 23.03,11.165
GATEB: Q2.4 Q2.6 U2.37 | length 34.9
  Top Layer w0.2: U2.37@22.337,10.739 22.337,11.204 23.011,11.879 23.66,11.879 v1(23.734,11.804) ; U2.37@22.337,11.039 cw(c22.736,11.039) 22.454,11.321 ; 23.193,11.879 cw(c23.193,11.264) v1@23.628,11.698 ; v1(32.824,5.867) 32.847,5.845 35.607,5.845 ; v1@32.93,5.761 cw(c33.131,5.56) 33.131,5.845 ; v1@32.93,5.973 ccw(c33.241,6.284) 33.241,5.845 ; 35.598,5.842 ccw(c35.507,6.18) Q2.4@35.81,6.005 ; 35.597,5.894 cw(c35.703,5.71) Q2.4@35.835,5.876 ; Q2.4@35.983,5.205 ccw(c36.478,5.491) 36.33,4.939 ; 37.499,4.929 ccw(c37.351,5.481) Q2.6@37.846,5.196 ; Q2.6@37.933,5.449 37.15,4.666 36.735,4.666 35.897,5.505 Q2.4@35.897,5.555 35.607,5.845 ; 35.607,5.845 ccw(c35.607,6.049) 35.801,5.986 cw(c35.607,6.049) 35.607,5.845 ; 35.389,5.845 ccw(c35.389,6.463) 35.826,6.026 cw(c35.389,6.463) 35.389,5.845 ; Q2.4@35.897,5.055 cw(c35.897,3.969) 36.664,4.737 ccw(c35.897,3.969) Q2.4@35.897,5.055 ; Q2.4@35.897,5.255 cw(c35.897,4.652) 36.323,5.078 ccw(c35.897,4.652) Q2.4@35.897,5.255 ; Q2.4@35.897,5.455 cw(c35.897,5.335) 35.981,5.42 ccw(c35.897,5.335) Q2.4@35.897,5.455 ; 37.244,4.76 cw(c37.933,4.072) 37.933,5.046 ccw(c37.933,4.072) 37.244,4.76 ; 37.586,5.102 cw(c37.933,4.755) 37.933,5.246 ccw(c37.933,4.755) 37.586,5.102 ; Q2.6@37.927,5.443 cw(c37.933,5.438) 37.933,5.446 ccw(c37.933,5.438) Q2.6@37.927,5.443
  Mid-Layer 1 w0.2: v1(23.734,11.804) 23.801,11.804 24.296,11.31 25.616,11.31 26.147,11.841 32.323,11.841 32.957,11.208 32.957,8.896 34.159,7.694 34.159,6.403 33.623,5.867 v1(32.824,5.867) ; v1@32.93,5.761 cw(c33.186,5.505) 33.186,5.867 cw(c33.186,6.229) v1@32.93,5.973
GATEC: Q5.4 Q5.6 U2.38 | length 40.3
  Top Layer w0.2: U2.38@21.937,10.739 21.937,11.37 22.977,12.41 25.189,12.41 v1(25.281,12.318) ; 24.697,12.41 cw(c24.697,11.734) v1@25.175,12.212 ; v1(34.2,4.81) 34.969,4.81 35.913,3.866 37.926,3.866 38.344,4.285 41.343,4.285 42.608,5.55 Q5.4@43.2,5.55 43.2,5.5 44.039,4.661 44.453,4.661 45.236,5.444 Q5.6@45.236,5.541 ; v1@34.306,4.704 cw(c34.562,4.448) 34.562,4.81 cw(c34.562,5.172) v1@34.306,4.916 ; Q5.4@43.286,5.2 ccw(c43.781,5.485) 43.633,4.934 ; 42.958,5.55 cw(c42.958,5.308) 43.129,5.479 ccw(c42.958,5.308) 42.958,5.55 ; 42.958,5.55 ccw(c42.958,5.791) 43.129,5.621 cw(c42.958,5.791) 42.958,5.55 ; Q5.4@43.2,5.05 cw(c43.2,3.964) 43.968,4.732 ccw(c43.2,3.964) Q5.4@43.2,5.05 ; Q5.4@43.2,5.25 cw(c43.2,4.647) 43.626,5.073 ccw(c43.2,4.647) Q5.4@43.2,5.25 ; Q5.4@43.2,5.45 cw(c43.2,5.33) 43.285,5.415 ccw(c43.2,5.33) Q5.4@43.2,5.45
  Mid-Layer 1 w0.2: v1(25.281,12.318) 25.604,12.641 32.655,12.641 33.757,11.539 33.757,9.228 34.959,8.025 34.959,5.569 v1(34.2,4.81) ; v1@25.281,12.468 ccw(c25.281,12.83) 25.537,12.574 ccw(c25.793,12.318) v1@25.431,12.318 ; v1@34.2,4.96 ccw(c34.2,5.322) 34.456,5.066 ccw(c34.712,4.81) v1@34.35,4.81
GATEL: Q1.4 Q1.6 U2.34 | length 40.3
  Top Layer w0.2: U2.34@23.137,9.139 23.947,9.139 24.596,9.788 v1@24.596,11.86 ; v1@33.466,5.323 cw(c33.759,5.029) 33.759,5.445 ; v1(33.501,5.288) 33.658,5.445 34.9,5.445 36.079,4.266 37.76,4.266 39.068,5.574 Q1.4@39.48,5.574 39.48,5.523 40.319,4.685 40.733,4.685 41.516,5.468 Q1.6@41.516,5.564 ; v1@33.607,5.181 cw(c34.242,4.546) 34.242,5.445 ; Q1.4@39.566,5.224 ccw(c40.061,5.509) 39.913,4.958 ; 41.083,4.948 ccw(c40.935,5.5) Q1.6@41.429,5.214 ; 39.238,5.574 cw(c39.238,5.332) 39.409,5.503 ccw(c39.238,5.332) 39.238,5.574 ; 39.238,5.574 ccw(c39.238,5.815) 39.409,5.644 cw(c39.238,5.815) 39.238,5.574 ; v1@24.417,11.754 cw(c23.986,11.322) 24.596,11.322 ccw(c23.986,11.322) v1@24.417,11.754 ; Q1.4@39.48,5.074 cw(c39.48,3.988) 40.247,4.756 ccw(c39.48,3.988) Q1.4@39.48,5.074 ; Q1.4@39.48,5.274 cw(c39.48,4.671) 39.906,5.097 ccw(c39.48,4.671) Q1.4@39.48,5.274 ; Q1.4@39.48,5.474 cw(c39.48,5.354) 39.565,5.439 ccw(c39.48,5.354) Q1.4@39.48,5.474 ; 40.828,4.779 cw(c41.516,4.091) 41.516,5.064 ccw(c41.516,4.091) 40.828,4.779 ; 41.169,5.121 cw(c41.516,4.774) 41.516,5.264 ccw(c41.516,4.774) 41.169,5.121 ; Q1.6@41.51,5.462 cw(c41.516,5.457) 41.516,5.464 ccw(c41.516,5.457) Q1.6@41.51,5.462
  Mid-Layer 1 w0.2: v1(24.523,11.86) 24.615,11.768 25.508,11.768 25.982,12.241 32.489,12.241 33.357,11.374 33.357,9.062 34.559,7.86 34.559,5.735 34.184,5.36 33.573,5.36 v1(33.501,5.288) ; v1@24.63,11.966 ccw(c25.107,12.443) 25.107,11.768 ; v1@33.607,5.181 cw(c34.037,4.751) 34.037,5.36